# Altium PCB Portier.PcbDoc
Units mm, origin at the board's own origin, x right, y up, seen from the top; angles counter-clockwise.
Board outline 100.33 x 100.33 mm, 2 copper layers (Top Layer, Bottom Layer), stack 1.586 mm thick; 51 components, 37 nets, 201 pads, 58 vias.
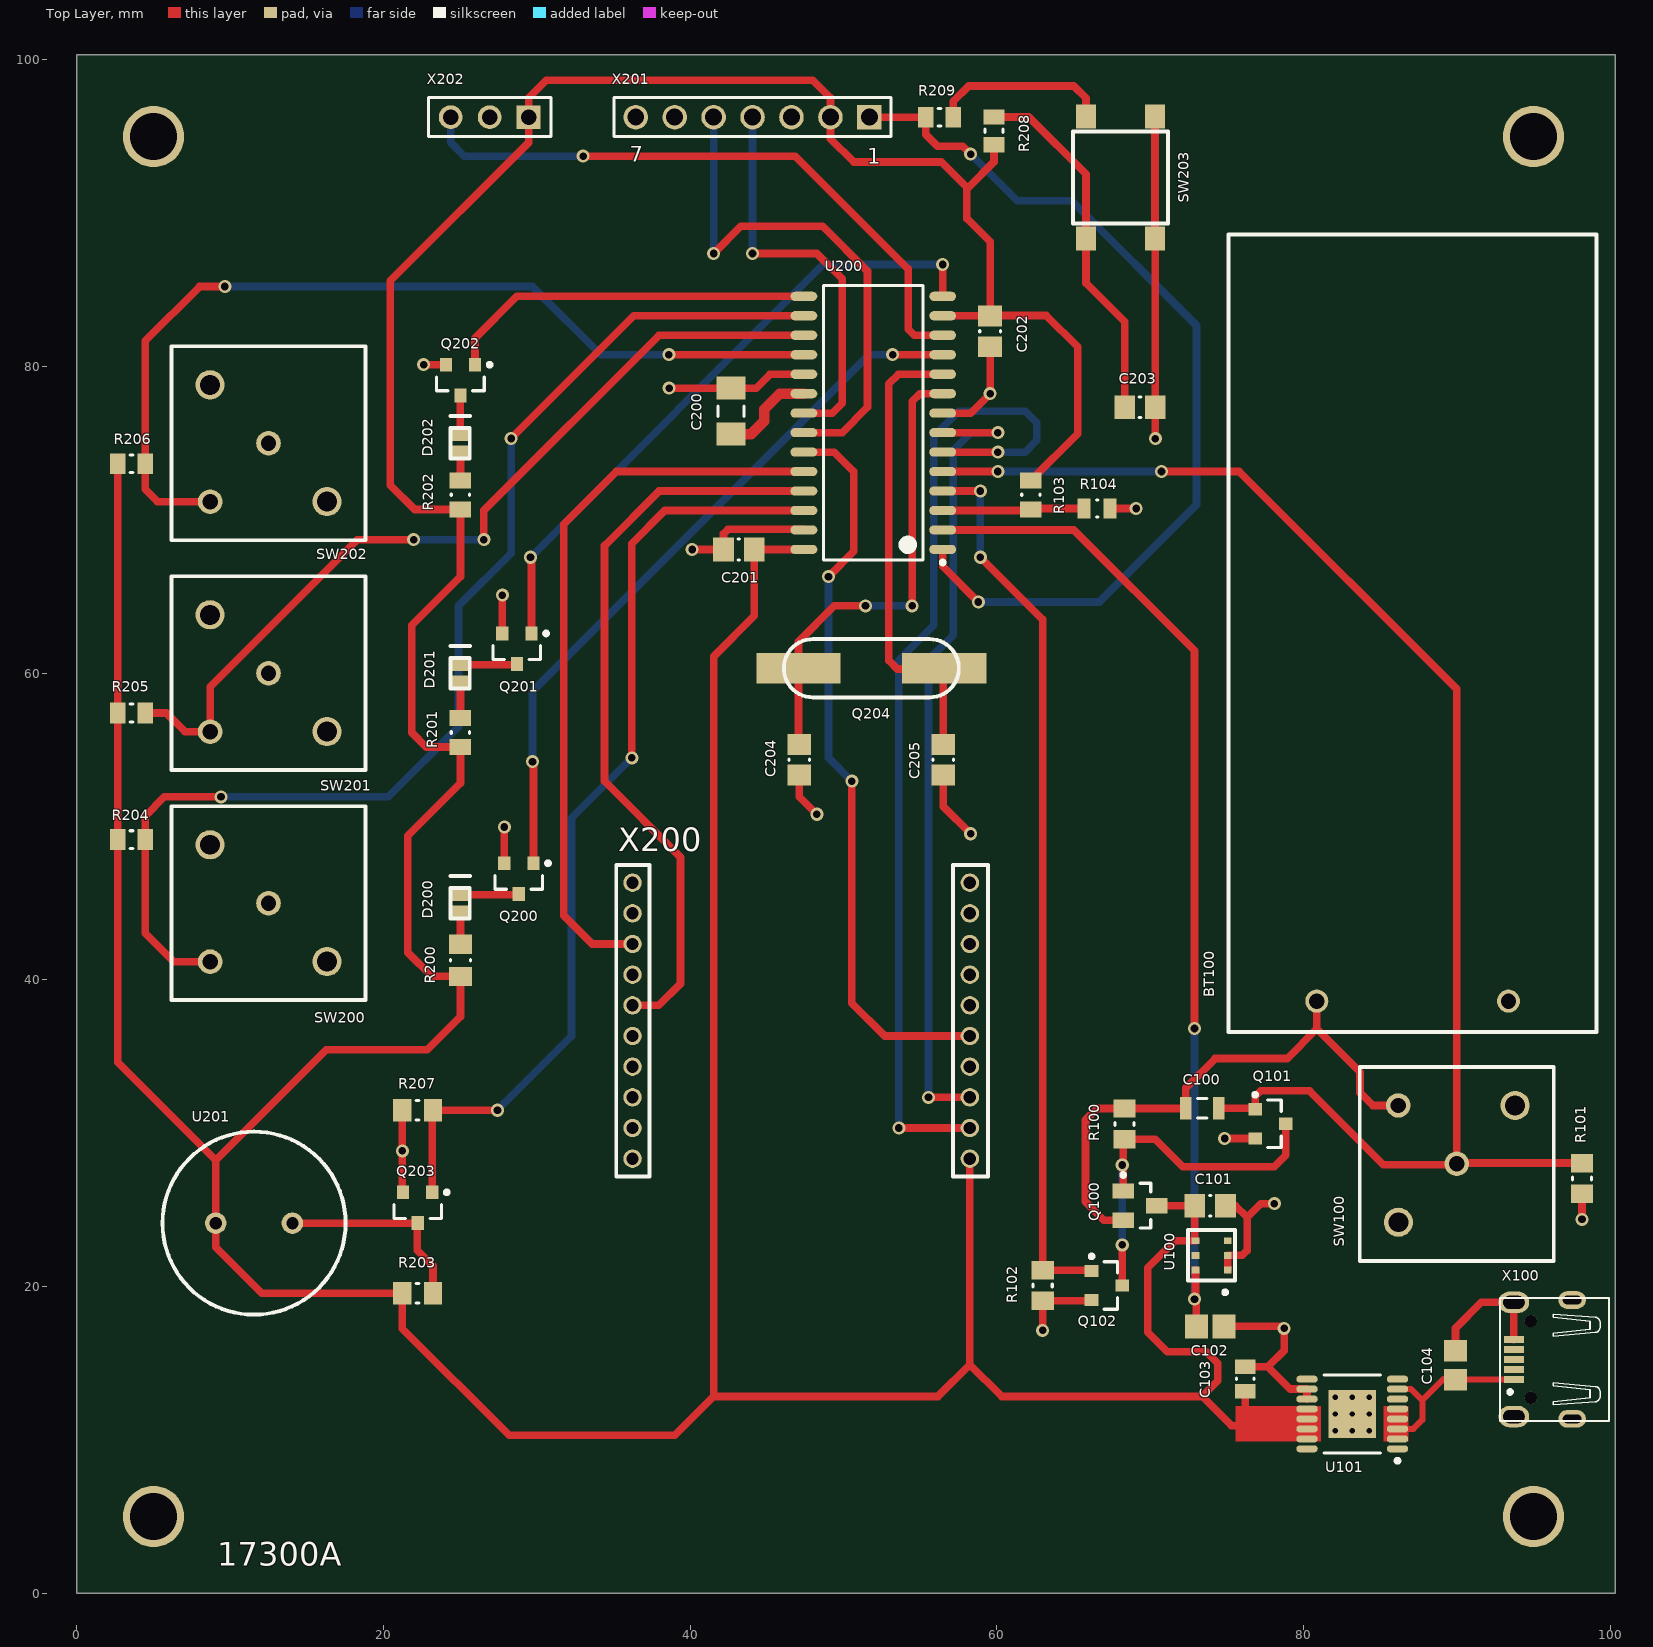
[diagram p0: Top Layer view]
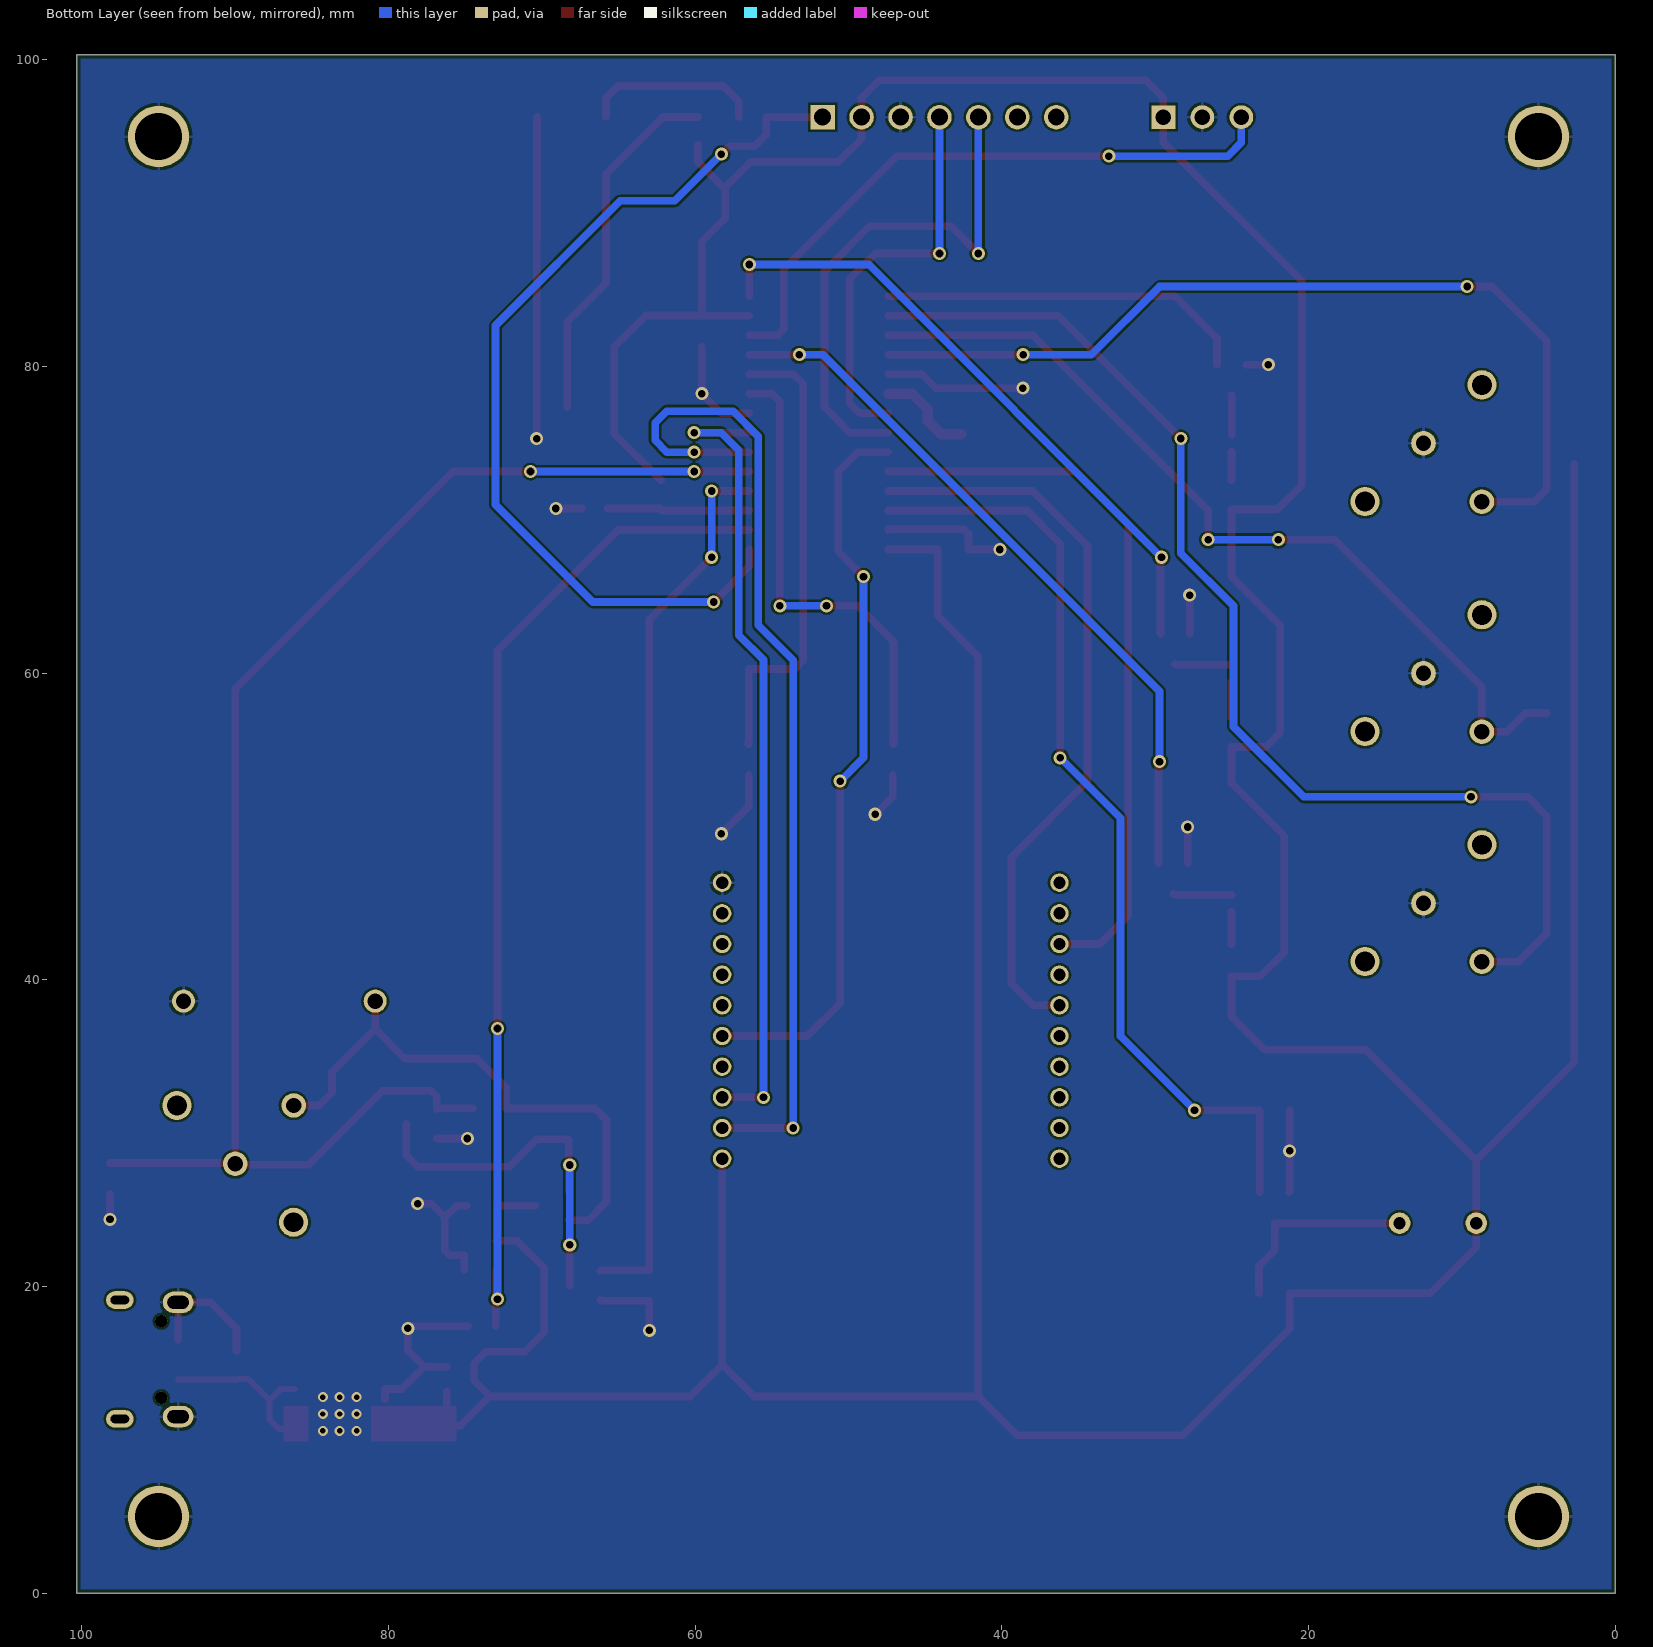
[diagram p1: Bottom Layer view, seen from below]

## Layer stack, top to bottom
Top Solder: solder mask 0.0102, Solder Resist, Dk 3.5
Top Layer: signal copper 0.018
Dielectric1: core 1.55, FR-4, Dk 4.8
Bottom Layer: signal copper 0.018
Bottom Solder: solder mask 0.0102, Solder Resist, Dk 3.5

## Board outline
0,0 100.33,0 100.33,100.33 0,100.33

## Design rules (kind name [scope] priority, off if disabled: settings)
BoardOutlineClearance [All] p1: gap=0.25 ignorepadtopadclearanceinfootprint=FALSE except(0: Arc-SplitContinuation Track-SplitContinuation SMDPad-SplitContinuation THPad-SplitContinuation Via-SplitContinuation Fill-SplitContinuation Poly-SplitContinuation Region-SplitContinuation Text-SplitContinuation)
Clearance Clearance-xPP-xTP-xTT [All] p1: gap=0.15 ignorepadtopadclearanceinfootprint=FALSE except(0: Arc-Hole Track-Hole SMDPad-Hole THPad-Hole Via-Hole Fill-Hole Poly-Hole Region-Hole Text-Hole)
ComponentClearance [All] p1: gap=0.25 collisioncheckmode=3 verticalgap=0.25 showdistances=FALSE
DiffPairsRouting [All] p1: maxlimit=0.25 minlimit=0.25 mostfreqgap=0.25 toplayer_minwidth=0.381 toplayer_maxwidth=0.381 toplayer_prefwidth=0.381 bottomlayer_minwidth=0.381 bottomlayer_maxwidth=0.381 bottomlayer_prefwidth=0.381 maxuncoupledlength=12.5
Height [All] p1: minheight=0 maxheight=25 prefheight=12.5
HoleSize HoleSize-PTH [All] p1: absolutevalues=TRUE maxlimit=3.5 minlimit=0.25 maxpercent=80.000 minpercent=20.000
HoleToHoleClearance [All] p1: gap=0.35 allowstackedmicrovias=TRUE
MinimumAnnularRing [All] p1: minimumring=0.125
MinimumSolderMaskSliver [All] p1: minsoldermaskwidth=0.08
PlaneClearance PlaneClearance-IPI [All] p1: clearance=0.25
PlaneConnect [All] p1: planeconnectstyle=Relief reliefexpansion=0.175 reliefentries=4 reliefconductorwidth=0.2 reliefairgap=0.2
PolygonConnect PolygonConnect-xTW [All] p1: thpad.connectstyle=Relief thpad.reliefconductorwidth=0.2 thpad.reliefentries=4 thpad.polygonreliefangle="90 Angle" thpad.airgapwidth=0.2 smdpad.connectstyle=Relief smdpad.reliefconductorwidth=0.2 smdpad.reliefentries=4 smdpad.polygonreliefangle="90 Angle" smdpad.airgapwidth=0.2 via.connectstyle=Direct via.reliefconductorwidth=0.2 via.reliefentries=4 via.polygonreliefangle="90 Angle" via.airgapwidth=0.2
RoutingCorners [All] p1: cornerstyle=45-Degree minsetback=2.5 maxsetback=2.5
RoutingVias [All] p1: holewidth=0.35 width=0.6 viastyle="Through Hole" minholewidth=0.35 minwidth=0.6 maxholewidth=0.8 maxwidth=1.6
SilkToSilkClearance [All] p1: silktosilkclearance=0.2
SilkToSolderMaskClearance SilkscreenOverComponentPads [IsPad] p1: minsilkscreentomaskgap=0.2 clearancetoexposedcopper=TRUE
SolderMaskExpansion SolderMaskExpansion_1 [IsVia] p1: expansion=-5
SolderMaskExpansion [All] p2: expansion=0.1
UnRoutedNet [All] p1: checkbadconnections=TRUE
Width Width-xTW [All] p1: maxlimit=1.5 minlimit=0.15 preferedwidth=0.2
18 further rules are at their usual default settings.

## Classes and differential pairs
component class Alimentation: BT100 C100 C101 C102 C103 C104 Q100 Q101 Q102 R100 R101 R102 R103 R104 SW100 U100 U101 X100
component class Circuit: C200 C201 C202 C203 C204 C205 D200 D201 D202 P201 Q200 Q201 Q202 Q203 Q204 R200 R201 R202 R203 R204 R205 R206 R207 R208 R209 SW200 SW201 SW202 SW203 U200 U201 X200 X201 X202

## Components (designator, comment, footprint, x,y, rotation, side; value= is the part's Value field where it differs from the comment)
BT100 "2 x 1.5V" BATTERYSUPPORT 87.122,62.611 r180 top value="2x 1V5"
C100 "100nF" CAPC2013X100X20NL20 73.406,31.623 r180 top value="100 nF"
C101 "100nF 16V" CAPC0805(2012)145_M 73.914,25.273 r180 top value=100nF
C102 "1uF" CAPC2013X145X50ML20T25 73.914,17.399 r180 top
C103 "6.8uF 16V" CAPC0805(2012)145_L 76.2,13.97 r270 top value=6.8uF
C104 "4.7uF" CAPC2013X135X45LL10T25 89.916,14.859 r270 top value="4.7 uF"
C200 "10uF" CAPC3216X180X50ML20T25 42.672,77.089 r90 top value="10 uF"
C201 "100nF 16V" CAPC0805(2012)145_M 43.18,68.072 r0 top value=100nF
C202 "100nF 16V" CAPC0805(2012)145_M 59.563,82.296 r90 top value=100nF
C203 "100nF 16V" CAPC0805(2012)145_M 69.342,77.343 r180 top value=100nF
C204 "22pF 16V" CAPC0805(2012)145_M 47.117,54.356 r90 top value=22pF
C205 "22pF 16V" CAPC0805(2012)145_M 56.515,54.356 r90 top value=22pF
D200 "LED_LC" LED_0805 25,45 r90 top value=Green
D201 "LED_LC" LED_0805 25,60 r90 top value=Yellow
D202 "LED_LC" LED_0805 25,75 r90 top value=Red
Q100 "FDN306P" FAIR-SSOT3L-3_V 69.342,25.273 r0 top
Q101 "IRLML2402" INTR-IRLML2402TRPBF-3_V 77.851,30.607 r0 top
Q102 "IRLML2402" INTR-IRLML2402TRPBF-3_V 67.183,20.066 r0 top
Q200 "IRLML2402TRPBF" INTR-IRLML2402TRPBF-3_V 28.829,46.609 r270 top
Q201 "IRLML2402TRPBF" INTR-IRLML2402TRPBF-3_V 28.702,61.595 r270 top
Q202 "IRLML2402TRPBF" INTR-IRLML2402TRPBF-3_V 25.019,79.121 r270 top
Q203 "IRLML2402TRPBF" INTR-IRLML2402TRPBF-3_V 22.225,25.146 r270 top
Q204 "8MHz Oscillator" OSCILLATOR 51.816,60.325 r0 top value=8MHz
R100 "1k" RESC2013X60X35ML10T20 68.326,30.607 r90 top
R101 "100k" RESC2013X60X35ML10T20 98.171,27.051 r90 top
R102 "1k" RESC2013X60X35ML10T20 62.992,20.066 r90 top
R103 "11k 1%" RESC0805(2012)_N 62.23,71.628 r90 top value="1100.00 Ohm"
R104 "22k 1%" RESC0805(2012)_L 66.548,70.739 r180 top value="2200.00 Ohm"
R200 "330R 1%" RESC0805(2012)_M 25.019,41.275 r270 top value="330.00 Ohm"
R201 "750R 1%" RESC0805(2012)_N 25.019,56.134 r90 top value="750.00 Ohm"
R202 "750R 1%" RESC0805(2012)_N 25.019,71.628 r270 top value="750.00 Ohm"
R203 "1k" RESC2013X60X35ML10T20 22.225,19.558 r180 top value=1kOhm
R204 "10k" RESC2013X60X35NL10T20 3.556,49.149 r180 top
R205 "10k" RESC2013X60X35NL10T20 3.556,57.404 r180 top
R206 "10k" RESC2013X60X35NL10T20 3.556,73.66 r180 top
R207 "100k" RESC2013X60X35ML10T20 22.225,31.496 r0 top
R208 "10k" RESC2013X60X35NL10T20 59.817,95.377 r90 top
R209 "1k" RESC2013X60X35NL10T20 56.261,96.266 r180 top
SW100 "Poussoir" SWITCH_SCHURTER 90,28 r0 top
SW200 "SW" SWITCH_SCHURTER 12.5,45 r90 top
SW201 "SW" SWITCH_SCHURTER 12.5,60 r90 top
SW202 "SW" SWITCH_SCHURTER 12.5,75 r90 top
SW203 "430152050836" 4301x20508x6_6x6x5 68.072,92.329 r90 top
U100 "LT1790BCS6" SOT-23 74.007,22.032 r90 top
U101 "MAX1793" TSOP65P640X110_HS-17N 83.185,11.684 r180 top
U200 "PIC32MX130F064B-I/SO" MCHP-SOIC-SO28_L 51.943,76.327 r180 top
U201 "BuzzerPiezo" BUZZER 11.557,24.13 r0 top
X100 "Micro_USB" MICRO_USB 93.726,15.24 r90 top
X200 "Header ZB-SB" ZB-SB 47.244,37.338 r180 top value=2x10
X201 "2.54 mm_THT_Vertical_7 pin" 61300711121 44.069,96.266 r180 top
X202 "TSW-103-07-F-S" SMTC-TSW-103-07-X-S 29.464,96.266 r180 top value=1x3

## Footprints (in the part's own frame and the unit in brackets; to place one, negate y for a bottom-side part, rotate by r counter-clockwise, add the part's x,y. Pads: shape width x height; smd on the part's side, far side on the other; paste and mask are expansions set on the pad)
4301x20508x6_6x6x5 [mm] "6x6mm Tact Switch, SMD version"
  rect 1.55x1.3 smd: 1(-3.975,2.25) 2(-3.975,-2.25) 3(3.975,2.25) 4(3.975,-2.25)
  silkscreen extent -3,-3.1 3,3.1, body extent -4.5,-3.1 4.5,3.1, height 5.02
61300711121 [mm] "Pin Header, pitch 2.54 mm, THT, Vertical, single row, 7p"
  rect 1.6x1.6 hole 1.1: 1(-7.62,0)
  round 1.6 hole 1.1: 2(-5.08,0) 3(-2.54,0) 4(0,0) 5(2.54,0) 6(5.08,0) 7(7.62,0)
  silkscreen extent -9.04,-1.27 9.04,1.27, body extent -8.89,-1.27 8.89,1.27, height 8.57
BATTERYSUPPORT [mm] "Battery Support 2 x 1.5V type AAA"
  round 1.5 hole 1: 1(6.25,24) 2(-6.25,24)
  silkscreen extent -12,-26 12,26, body extent -12,-26 12,25.91, height 13
BUZZER [mm] "Buzzer d_12mm"
  round 1.4 hole 0.8: 1(-2.5,0) 2(2.5,0)
  silkscreen extent -5.97,-5.97 5.97,5.97, body extent -5.97,-5.71 5.97,5.71, height 6.5
CAPC0805(2012)145_L [mm] "Chip Capacitor, Body 2.0x1.2mm, Height 1.45mm, IPC High Density"
  rect 0.95x1.35 smd: 1(-0.8,0) 2(0.8,0)
  silkscreen extent -0.05,-0.58 0.05,0.58, body extent -1.1,-0.72 1.1,0.72, height 1.45
CAPC0805(2012)145_M [mm] "Chip Capacitor, Body 2.0x1.2mm, Height 1.45mm, IPC Low Density"
  rect 1.35x1.55 smd: 1(-1,0) 2(1,0)
  silkscreen extent -0.05,-0.67 0.05,0.67, body extent -1.1,-0.72 1.1,0.72, height 1.45
CAPC2013X100X20NL20 [mm] "Chip Capacitor, 2-Leads, Body 2.2x1.45mm, IPC Medium Density"
  rect 0.75x1.45 smd: 1(-1.075,0) 2(1.075,0)
  silkscreen extent -0.3,-0.63 0.3,0.63, body extent -1.1,-0.72 1.1,0.72, height 1
CAPC2013X135X45LL10T25 [mm] "Chip Capacitor, 2-Leads, Body 2.10x1.35mm, IPC High Density"
  rect 1.4x1.5 smd: 1(-0.95,0) 2(0.95,0)
  body extent -1.05,-0.67 1.05,0.67, height 1.35
CAPC2013X145X50ML20T25 [mm] "Chip Capacitor, 2-Leads, Body 2.00x1.25mm, IPC Low Density"
  rect 1.5x1.55 smd: 1(-0.9,0) 2(0.9,0)
  body extent -1.1,-0.72 1.1,0.72, height 1.45
CAPC3216X180X50ML20T25 [mm] "Chip Capacitor, 2-Leads, Body 3.40x1.80mm, IPC Low Density"
  rect 1.5x1.9 smd: 1(-1.5,0) 2(1.5,0)
  silkscreen extent -0.35,-0.85 0.35,0.85, body extent -1.7,-0.9 1.7,0.9, height 1.8
FAIR-SSOT3L-3_V [mm] "SOT23, 3-Leads, Body 2.92x1.4mm, Pitch 0.95mm"
  rect 1.4x1 smd: 1(-1.1,0.95) 2(-1.1,-0.95) 3(1.1,0)
  silkscreen extent -1.22,-1.46 0.7,2.12, body extent -1.26,-1.46 1.26,1.46, height 1.12
INTR-IRLML2402TRPBF-3_V [mm] "SOT23, 3-Leads, Body 3.05x1.4mm, Pitch 0.95mm"
  rect 0.9x0.8 smd: 1(-1,0.95) 2(-1,-0.95) 3(1,0)
  silkscreen extent -1.12,-1.55 0.7,2.02, body extent -0.7,-1.52 0.7,1.53, height 1.11
LED_0805 [mm] "LED_0805"
  rect 0.8x1.1 smd: 1(-0.55,0) 2(0.55,0)
  silkscreen extent -1,-0.63 1.78,0.64, body extent -1.02,-0.64 1.02,0.64, height 1.25
MCHP-SOIC-SO28_L [mm] "SOIC, 28-Leads, Body 17.9x7.5mm, Pitch 1.27mm, IPC High Density"
  oval 1.75x0.6 smd: 1(-4.525,8.255) 2(-4.525,6.985) 3(-4.525,5.715) 4(-4.525,4.445) 5(-4.525,3.175) 6(-4.525,1.905) 7(-4.525,0.635) 8(-4.525,-0.635) 9(-4.525,-1.905) 10(-4.525,-3.175) 11(-4.525,-4.445) 12(-4.525,-5.715) 13(-4.525,-6.985) 14(-4.525,-8.255) 15(4.525,-8.255) 16(4.525,-6.985) 17(4.525,-5.715) 18(4.525,-4.445) 19(4.525,-3.175) 20(4.525,-1.905) 21(4.525,-0.635) 22(4.525,0.635) 23(4.525,1.905) 24(4.525,3.175) 25(4.525,4.445) 26(4.525,5.715) 27(4.525,6.985) 28(4.525,8.255)
  silkscreen extent -4.65,-8.95 3.25,9.23, body extent -3.75,-8.95 3.75,8.95, height 2.65
MICRO_USB [mm] "WR-COM_USB_Micro Type B_Horizontal_SMT Micro Type B Horizontal SMT - 3A current at Pin1 & Pin 5 - with Pegs and THT shielding Pins  - T&R Packaging"
  rect 0.45x1.3 smd: 1(-1.3,0) 2(-0.65,0) 3(0,0) 4(0.65,0) 5(1.3,0)
  oval 1.4x2 hole 0.85 slot 1.4 at 90 deg: Z1(-3.725,0) Z2(3.725,0)
  oval 1.15x1.8 hole 0.55 slot 1.2 at 90 deg: Z4(-3.875,-3.8) Z4(3.875,-3.8)
  round 0.8 hole 0.8 unplated: ""(-2.5,-1.1) ""(2.5,-1.1)
  silkscreen extent -4,-6.2 4,0.9, body extent -4,-6.25 4,0.35, height 2.67
OSCILLATOR [mm] "Oscillator 8MHz"
  rect 5.5x2 smd: 1(-4.75,0) 2(4.75,0)
  silkscreen extent -5.71,-1.9 5.71,1.9, body extent -5.71,-1.9 5.71,1.9, height 3.7
RESC0805(2012)_L [mm] "Chip Resistor, Body 2.0x1.3mm, IPC High Density"
  rect 0.85x1.3 smd: 1(-0.85,0) 2(0.85,0)
  silkscreen extent -0.05,-0.55 0.05,0.55, body extent -1.1,-0.67 1.1,0.68, height 0.7
RESC0805(2012)_M [mm] "Chip Resistor, Body 2.0x1.3mm, IPC Low Density"
  rect 1.25x1.5 smd: 1(-1.05,0) 2(1.05,0)
  silkscreen extent -0.05,-0.65 0.05,0.65, body extent -1.1,-0.67 1.1,0.67, height 0.7
RESC0805(2012)_N [mm] "Chip Resistor, Body 2.0x1.3mm, IPC Medium Density"
  rect 1.05x1.4 smd: 1(-0.95,0) 2(0.95,0)
  silkscreen extent -0.05,-0.6 0.05,0.6, body extent -1.1,-0.67 1.1,0.68, height 0.7
RESC2013X60X35ML10T20 [mm] "Chip Resistor, 2-Leads, Body 2.1x1.35mm, IPC Low Density"
  rect 1.2x1.45 smd: 1(-1,0) 2(1,0)
  silkscreen extent -0.1,-0.63 0.1,0.63, body extent -1.05,-0.68 1.05,0.67, height 0.6
RESC2013X60X35NL10T20 [mm] "Chip Resistor, 2-Leads, Body 2.1x1.35mm, IPC Medium Density"
  rect 1x1.35 smd: 1(-0.9,0) 2(0.9,0)
  silkscreen extent -0.1,-0.58 0.1,0.58, body extent -1.05,-0.68 1.05,0.67, height 0.6
SMTC-TSW-103-07-X-S [mm] ".025 SQ Post Terminal Strip Assembly, 1x3 Pins, Vertical, 2.54mm Pitch, Male"
  rect 1.55x1.55 hole 1.02: 1(0,0)
  round 1.55 hole 1.02: 2(2.54,0) 3(5.08,0)
  silkscreen extent -1.46,-1.27 6.54,1.27, body extent -1.27,-1.27 6.35,1.27, height 8.38
SOT-23 [mm] "LT1790  SOT-23"
  rect 0.45x0.5 smd: 1(-0.95,-1.05) 2(0,-1.05) 3(0.95,-1.05) 4(0.95,1.05) 5(0,1.05) 6(-0.95,1.05)
  silkscreen extent -2.54,-1.52 1.65,1.52, body extent -1.52,-1.14 1.52,1.05, height 1.25
SWITCH_SCHURTER [mm] "switch 12.7x12.7"
  round 1.6 hole 1: 1(0,0) 2(-3.81,3.81)
  round 1.9 hole 1.3: " "(-3.81,-3.81) " "(3.81,3.81)
  silkscreen extent -6.32,-6.32 6.32,6.32, body extent -6.35,-6.35 6.35,6.22, height 17.5
TSOP65P640X110_HS-17N [mm] "TSOP, 16-Leads, Body 5.00x4.40mm, Pitch 0.65mm, Thermal Pad 3.10x3.10mm, IPC Medium Density"
  oval 1.4x0.45 smd: 1(-2.95,2.275) 2(-2.95,1.625) 3(-2.95,0.975) 4(-2.95,0.325) 5(-2.95,-0.325) 6(-2.95,-0.975) 7(-2.95,-1.625) 8(-2.95,-2.275) 9(2.95,-2.275) 10(2.95,-1.625) 11(2.95,-0.975) 12(2.95,-0.325) 13(2.95,0.325) 14(2.95,0.975) 15(2.95,1.625) 16(2.95,2.275)
  rect 3.1x3.1 smd: EP(0,0)
  silkscreen extent -3.08,-2.55 1.85,3.17, body extent -3.19,-2.55 3.19,2.55, height 1.1
ZB-SB [mm] "Header"
  round 1.2 hole 0.8: 1(-11,9) 2(-11,7) 3(-11,5) 4(-11,3) 5(-11,1) 6(-11,-1) 7(-11,-3) 8(-11,-5) 9(-11,-7) 10(-11,-9) 11(11,9) 12(11,7) 13(11,5) 14(11,3) 15(11,1) 16(11,-1) 17(11,-3) 18(11,-5) 19(11,-7) 20(11,-9)
  silkscreen extent -12.19,-10.16 12.07,10.16, body extent -12.06,-10.22 12.06,10.16, height 6

## Part data
BT100: library part "Battery connector AAA", "Battery Support 2x1.5V type AAA", Manufacturer="Keystone Electronics", PartNumber=1022, Supplier=Digi-key, Supplier PN=36-1022-ND
C100: library part CMP-1663-00007-1, "Chip Capacitor, 100 nF, +/- 10%, 16 V, -55 to 85 degC, 0805 (2012 Metric), RoHS, Tape and Reel", PackageCase=0805, Voltage Rating="16 V"
C101 C201 C202 C203: library part CMP-1036-04404-1, "CAP 100nF 16V ±20% 0805 (2012 Metric) Thickness 1.45mm SMD", PackageCase=0805
C102: library part CMP-2100-03605-1, "Chip Capacitor, 1 uF, 25 V, 10%, -55 to 125 degC, 0805 (2012 Metric), RoHS, Tape and Reel", PackageCase=0805, Voltage Rating=25V
C103: library part CMP-1036-04912-1, "CAP 6.8uF 16V ±20% 0805 (2012 Metric) Thickness 1.45mm SMD", PackageCase=0805
C104: library part CMP-1662-00015-2, "Chip Capacitor, 4.7 uF, +/- 10%, 16 V, -55 to 85 degC, 0805 (2012 Metric), RoHS, Tape and Reel", PackageCase=0805, PartNumber=GRM21BR61C475KA88L, Voltage Rating="16 V"
C200: library part CMP-1664-00006-1, "CAP, Ceramic, 10 uF, +/- 10%, 16 V, -55 to 125 degC, 1206 (3216 Metric), RoHS, Tape and Reel", PackageCase=0603, Voltage Rating="50 V"
C204 C205: library part CMP-1036-04404-1, "CAP 22pF 16V ±20% 0805 (2012 Metric) Thickness 1.45mm SMD", PackageCase=0805
D200: library part "LED LOW CURRENT", "LED_LOWCurrent", Manufacturer=Kingbright, PartNumber=APTD20120LZGCK, Voltage Rating=2V65, Supplier=Mouser, Supplier PN=604-APTD2012LZGCK
D201: library part "LED LOW CURRENT", "LED_LOWCurrent", Manufacturer=Kingbright, PartNumber=APTD2012LSYCK, Voltage Rating=1V85, Supplier=Mouser, Supplier PN=604-APTD2012LSYCK
D202: library part "LED LOW CURRENT", "LED_LOWCurrent", Manufacturer=Kingbright, PartNumber=APTD2012LSURCK, Voltage Rating=1V75, Supplier=Mouser, Supplier PN=604-APTD2012LSURCK
Q100: library part CMP-2000-06248-1, "P-Channel Specified Power Trench (R) MOSFET, 1.8 V, -55 to 150 degC, 3-Pin SOT, RoHS, Tape and Reel", Manufacturer="ON Semiconductor", PackageCase=SSOT-3, PartNumber=FDN306P, Supplier=Digi-key, Supplier PN=FDN306PCT-ND
Q101 Q102 Q200 Q201 Q202 Q203: library part CMP-2000-05155-1, "HEXFET(R) Power MOSFET, N-Channel, 20 V, 1.2 A, 3-Pin SOT-23, RoHS, Tape and Reel", Manufacturer="Infineon Technologies", PackageCase=SOT-23, PartNumber=IRLML2402TRBF, Supplier=Digi-key, Supplier PN=IRLML2402PBFCT-ND
Q204: library part "Oscillator 8MHz", "Oscillator 8MHz", Manufacturer=IQD, PartNumber="LF XTAL003151", Supplier=Distrelec, Supplier PN=174-52-030
R100 R102 R203: library part CMP-2100-03671-1, "Chip Resistor, 1 KOhm, +/- 1%, 125 mW, -55 to 155 degC, 0805 (2012 Metric), RoHS, Tape and Reel", PackageCase=0805, Voltage Rating=150V
R101 R207: library part CMP-2100-03671-1, "Chip Resistor, 100 KOhm, +/- 1%, 125 mW, -55 to 155 degC, 0805 (2012 Metric), RoHS, Tape and Reel", PackageCase=0805, Voltage Rating=150V
R103: library part CMP-1013-00075-1, "11k 0.125W 0805 (2012 Metric)  SMD", PackageCase=0805
R104: library part CMP-1013-00082-1, "22k 0.125W  0805 (2012 Metric)  SMD", PackageCase=0805
R200: library part CMP-1013-00454-1, "330R 0.125W 1% 0805 (2012 Metric)  SMD", PackageCase=0805
R201 R202: library part CMP-1013-00496-1, "750R 0.125W 1% 0805 (2012 Metric)  SMD", PackageCase=0805
R204 R205 R206: library part CMP-1659-00013-4, "Chip Resistor, 10 KOhm, +/- 1%, 0.125 W, -55 to 155 degC, 0805 (2012 Metric), RoHS, Tape and Reel", PackageCase=0805, Voltage Rating="150 V"
R208: library part CMP-1659-00011-4, "Chip Resistor, 10 KOhm, +/- 1%, 0.125 W, -55 to 155 degC, 0805 (2012 Metric), RoHS, Tape and Reel", PackageCase=0805, Voltage Rating="150 V"
R209: library part CMP-1659-00011-4, "Chip Resistor, 1 KOhm, +/- 1%, 0.125 W, -55 to 155 degC, 0805 (2012 Metric), RoHS, Tape and Reel", PackageCase=0805, Voltage Rating="150 V"
SW100 SW200 SW201 SW202: library part Switch_Schurter, "Switch 12.7x12.7x17.5", Manufacturer=Schurter
SW203: "WS-TASV 6x6mm Tact Switch, SMD version", ComponentLink1Description=Manufacturer, ComponentLink1URL=http://www.we-online.de, ComponentLink2Description=Datasheet, ComponentLink2URL=http://katalog.we-online.de/em/datasheet/4301x2xxx8x6.pdf, Life Cycle="200000 cycles", Operation Force=360g, Part Number=430152050836, Published Date="June 2017", Publisher="Wurth Elektronik", Size="6x6x5 mm"
U100: library part LT1790, "IC VREF SERIES 2.048V SOT23-6", Manufacturer="Linear Technology", PackageCase=SOT-23, PartNumber=LT1790BCS6-2.048#TRMPBF, Supplier=Digi-key, Supplier PN=LT1790BCS6-2.048#TRMPBFCT-ND
U101: "IC REG LINEAR POS ADJ 1A 16TSSOP", Manufacturer="Maxim Integrated"
U200: library part CMP-0048-00454-1, "32-bit Microcontroller with Audio and Graphics Interface, USB and Advanced Analog, 40 MHz, 21 I/O, PMP, -40 to 85 degC, 28-pin SOIC (SO28), Tube", Manufacturer=Microchip, ComponentLink1Description="Manufacturer URL", ComponentLink1URL=http://www.microchip.com, ComponentLink2Description=Datasheet, ComponentLink2URL=http://ww1.microchip.com/downloads/en/DeviceDoc/61168E.pdf, ComponentLink3Description="Package Specification", ComponentLink3URL=http://www.microchip.com/stellent/groups/techpub_sg/documents/packagingspec/en012702.pdf, ComponentLink4Description="Product URL", ComponentLink4URL=http://www.microchip.com/PIC32MX130F064B, DatasheetVersion="Rev. E", Mounting Technology="Surface Mount", PackageDescription="28-Lead Plastic Small Outline, 17.9 x 7.5 mm Body, 1.27 mm Pitch", PackageReference=SOIC-SO28, PackageVersion=C04-052C, PartNumber=PIC32MX130F064B-I/SO
U201: library part BZR, "Buzzer 12mm piezo", Manufacturer="TDK Corporation", PartNumber=PS1240P02BT, Supplier=Digi-key, Supplier PN=445-2525-3-ND
X100: library part "WR-Communication Connectors 629105150521", "WR-COM_USB_Micro Type B_Horizontal_SMT", Manufacturer="Würth Elektronik eiSos GmbH", PartNumber=629105150521, Voltage Rating=5V, Supplier=Digi-key, Supplier PN=732-5960-1-ND
X200: library part "HDR ZB-SB 2x10", "Header 2x10", PackageCase=XBee
X201: library part 61300711121, "Pin Header WR-PHD, pitch 2.54 mm, THT, Vertical, single row, 7 pin", Contact Resistance="20 mOhm", Insulation Resistance=">1000 MOhm", Operating Temperature="-40 to 105 degC", Rated Current="3 A", Working Voltage="250 VAC", ComponentLink1Description=Manufacturer, ComponentLink1URL=http://www.we-online.de, ComponentLink2Description=Datasheet, ComponentLink2URL=http://katalog.we-online.de/em/datasheet/6130xx11121.pdf, Mounting Technology=THT, Orientation=Vertical, Part Number=61300711121, Pin Number=7, Pitch="2.54 mm", Published Date="Jan. 2018", Publisher="Wurth Elektronik", Row Number=Single
X202: library part CMP-1024-00331-1, "0.025\" SQ Post Header, Through-hole, Vertical, -55 to 125 degC, 2.54 mm Pitch, 3-Pin, Male, RoHS", Manufacturer=Samtec, PackageCase=TSW-103-07-X-S, PartNumber=TSW-103-07-F-S, Supplier=Digi-key, Supplier PN=SAM8995-ND

## Free pads (board coordinates)
  round 4 hole 3.05: 2(5,5) 3(95,5) 4(95,95) 5(5,95)

## Via types
v1: diameter 0.85, hole 0.5, Top Layer to Bottom Layer, 49 vias
v2: diameter 0.65, hole 0.35, Top Layer to Bottom Layer, 9 vias

## Nets (pads, with @x,y where several pads share a name; then routed paths per layer and width w, separated by ;. In a path a pad name is that pad's centre, name@x,y a point inside that pad or via, vN(x,y) a via of type N, cw(c..) or ccw(c..) an arc to the next point about the centre after c; other vN are vias at no path point)
+VBAT: BT100.1 C100.2 Q100.2 R100.2 SW100.2 | length 36.6
  Top Layer w0.5: Q100.2 66.99,24.323 65.786,25.527 65.786,30.861 66.532,31.607 R100.2 72.315,31.607 72.315,32.945 74.236,34.866 78.935,34.866 80.872,36.803 ; BT100.1 80.872,36.803 ; SW100.2 84.522,31.81 83.693,32.639 83.693,33.982 80.872,36.803
BZZR: Q203.1 R207.2 U200.26 | length 62.3
  Top Layer w0.5: Q203.1 23.175,31.446 R207.2 v1(27.432,31.496) ; v1(36.195,54.483) 36.195,68.453 38.354,70.612 U200.26
  Bottom Layer w0.5: v1(27.432,31.496) 32.258,36.322 32.258,50.546 v1(36.195,54.483)
Connect(M): U200.24 X200.18 | length 47.9
  Top Layer w0.5: X200.18 33.608,42.338 31.75,44.196 31.75,69.723 35.179,73.152 U200.24
GND: BT100.2 C101.1 C102.1 C103.1 C104.1 C200.2 C201.1 C202.1 C203.1 C204.1 C205.1 pad.2 pad.3 pad.4 pad.5 Q101.2 Q102.2 Q200.2 Q201.2 Q202.2 Q203.2 R101.1 R102.1 R104.1 R207.1 SW200.1 SW201.1 SW202.1 SW203.2 SW203.4 U100.1 U100.2 U101.10 U101.11 U101.EP U200.8 U200.19 U200.27 X100.5 X100.Z1 X100.Z2 X200.10 X201.3 X202.2 | length 104.1
  Top Layer w0.5: R207.1 v1(21.225,28.845) 21.225,26.196 Q203.2 ; v1(22.622,80.121) Q202.2 ; Q201.2 v1(27.752,65.09) ; Q200.2 v1(27.879,49.972) ; v1(38.632,78.589) C200.2 44.299,78.589 45.212,79.502 U200.19 ; v1(40.132,68.072) C201.1 42.18,69.104 42.473,69.397 47.418,69.397 U200.27 ; C204.1 47.117,51.943 v1(48.26,50.8) ; U200.8 58.293,76.962 v1(59.563,78.232) C202.1 ; C205.1 56.515,51.308 v1(58.293,49.53) ; v1(62.992,17.145) R102.1 66.133,19.066 Q102.2 ; R104.1 v1(69.088,70.739) ; SW203.4 SW203.2 70.342,88.334 C203.1 v1(70.342,75.295) ; C102.1 78.613,17.399 v1(78.74,17.272) 78.74,15.824 77.686,14.77 ; v1(74.864,29.657) Q101.2 ; C101.1 75.565,25.273 76.327,24.511 ; U100.1 U100.2 76.007,22.032 76.327,22.352 76.327,24.511 ; C103.1 77.686,14.77 ; v1(78.105,25.4) 77.216,25.4 76.327,24.511 ; U101.11 U101.10 79.147,13.309 77.686,14.77 ; C104.1 89.916,17.272 91.609,18.965 X100.Z2 X100.5 ; v1(98.171,24.384) R101.1
  other v2: 82.085,10.584 83.185,10.584 84.285,10.584 82.085,11.684 83.185,11.684 84.285,11.684 82.085,12.784 83.185,12.784 84.285,12.784
LED1: Q200.1 U200.11 | length 47.1
  Top Layer w0.5: v1(29.718,54.229) 29.779,54.168 Q200.1 ; v1(53.213,80.772) U200.11
  Bottom Layer w0.5: v1(29.718,54.229) 29.718,58.825 51.665,80.772 v1(53.213,80.772)
LED2: Q201.1 U200.14 | length 41.9
  Top Layer w0.5: v1(29.591,67.564) 29.652,67.503 Q201.1 ; U200.14 v1(56.468,86.661)
  Bottom Layer w0.5: v1(29.591,67.564) 48.688,86.661 v1(56.468,86.661)
LED3: Q202.1 U200.15 | length 24.3
  Top Layer w0.5: Q202.1 25.969,81.849 28.702,84.582 U200.15
LINK(M): U200.25 X200.16 | length 48.8
  Top Layer w0.5: X200.16 37.957,38.338 39.37,39.751 39.37,48.006 34.417,52.959 34.417,68.326 37.973,71.882 U200.25
N_A: U200.12 X202.3 | length 41.2
  Top Layer w0.5: v1(33.02,93.726) 46.863,93.726 54.229,86.36 54.229,82.423 54.61,82.042 U200.12
  Bottom Layer w0.5: X202.3 24.384,94.615 25.273,93.726 v1(33.02,93.726)
NetC100_1: C100.1 Q101.1 R101.2 SW100.1 U200.5 | length 97.1
  Top Layer w0.5: U200.5 v1(60.071,73.152) ; v1(70.739,73.152) 75.819,73.152 90,58.971 SW100.1 ; C100.1 76.785,31.623 Q101.1 76.851,32.401 77.216,32.766 80.391,32.766 85.217,27.94 89.94,27.94 SW100.1 ; R101.2 90.051,28.051 SW100.1
  Bottom Layer w0.5: v1(60.071,73.152) v1(70.739,73.152)
NetC102_2: C102.2 U100.6 U200.2 | length 65.7
  Top Layer w0.5: U200.2 65.024,69.342 72.898,61.468 v1(72.898,36.83) ; U100.6 72.957,19.236 v1(72.898,19.177) 73.014,19.061 C102.2
  Bottom Layer w0.5: v1(72.898,19.177) v1(72.898,36.83)
NetC104_2: C104.2 U101.2 U101.3 U101.4 U101.5 U101.7 X100.1 | length 11.9
  Top Layer w0.4: U101.3@85.885,10.709 U101.3 87.163,10.709 87.757,11.303 87.757,12.573 ; U101.7 87.021,13.309 87.757,12.573 ; X100.1 89.947,13.94 C104.2 89.855,13.97 89.154,13.97 87.757,12.573
NetC200_1: C200.1 U200.20 | length 6.3
  Top Layer w0.7: C200.1 43.966,75.589 44.831,76.454 44.831,77.216 45.847,78.232 U200.20
NetC203_2: C203.2 R208.2 SW203.1 | length 23.8
  Top Layer w0.5: R208.2 62.092,96.277 65.822,92.547 SW203.1 65.822,85.435 68.342,82.915 C203.2
NetD200_1: D200.1 R200.1 | length 2.1
  Top Layer w0.5: D200.1 25.019,44.431 R200.1
NetD200_2: D200.2 Q200.3 | length 3.9
  Top Layer w0.5: D200.2 28.77,45.55 Q200.3
NetD201_1: D201.1 R201.2 | length 2.4
  Top Layer w0.5: D201.1 25.019,59.431 R201.2
NetD201_2: D201.2 Q201.3 | length 3.7
  Top Layer w0.5: D201.2 28.657,60.55 Q201.3
NetD202_1: D202.1 R202.1 | length 1.9
  Top Layer w0.5: D202.1 25.019,74.431 R202.1
NetD202_2: D202.2 Q202.3 | length 2.6
  Top Layer w0.5: D202.2 25,78.102 Q202.3
NetQ100_1: Q100.1 Q101.3 Q102.3 R100.1 | length 25
  Top Layer w0.5: Q102.3 v1(68.183,22.717) ; Q100.1 68.242,27.865 v1(68.183,27.924) 68.242,27.983 68.242,29.523 R100.1 70.342,29.607 72.136,27.813 78.105,27.813 78.851,28.559 Q101.3
  Bottom Layer w0.5: v1(68.183,22.717) v1(68.183,27.924)
NetQ102_1: Q102.1 R102.2 U200.4 | length 58.2
  Top Layer w0.5: U200.4 v1(58.928,71.882) ; v1(58.928,67.564) 62.992,63.5 R102.2 66.133,21.066 Q102.1
  Bottom Layer w0.5: v1(58.928,67.564) v1(58.928,71.882)
NetQ203_3: Q203.3 R203.1 U201.2 | length 13.1
  Top Layer w0.5: U201.2 22.209,24.13 22.209,22.368 23.225,21.352 R203.1
NetR103_1: R103.1 R104.2 U200.3 | length 9.3
  Top Layer w0.5: U200.3 62.164,70.612 R103.1 62.291,70.739 R104.2
NetR209_1: R209.1 SW203.3 | length 11.6
  Top Layer w0.5: R209.1 57.161,97.293 58.166,98.298 65.024,98.298 65.822,97.5 SW203.3
OSC1: C204.2 Q204.1 U200.9 | length 30.6
  Top Layer w0.5: C204.2 47.066,55.407 Q204.1 47.066,62.052 49.403,64.389 v1(51.435,64.389) ; v1(54.483,64.389) 54.483,77.724 54.991,78.232 U200.9
  Bottom Layer w0.5: v1(51.435,64.389) v1(54.483,64.389)
OSC2: C205.2 Q204.2 U200.10 | length 30.6
  Top Layer w0.5: U200.10 53.594,79.502 52.959,78.867 52.959,60.833 53.518,60.274 56.515,60.274 C205.2 C205.2@56.566,55.407
PGEC: U200.22 X201.5 | length 34.6
  Top Layer w0.5: v1(41.529,87.376) 43.307,89.154 48.641,89.154 51.562,86.233 51.562,77.343 49.911,75.692 U200.22
  Bottom Layer w0.5: v1(41.529,87.376) X201.5
PGED: U200.21 X201.4 | length 26.3
  Top Layer w0.5: v1(44.069,87.376) 48.26,87.376 49.911,85.725 49.911,77.597 49.276,76.962 U200.21
  Bottom Layer w0.5: v1(44.069,87.376) X201.4
Reset: R209.2 U200.1 X201.1 | length 60.6
  Top Layer w0.5: X201.1 R209.2 55.361,95.134 56.134,94.361 57.785,94.361 v1(58.293,93.853) ; U200.1 56.468,66.976 v1(58.801,64.643)
  Bottom Layer w0.5: v1(58.293,93.853) 61.341,90.805 64.897,90.805 73.025,82.677 73.025,70.993 66.675,64.643 v1(58.801,64.643)
Reset(M): U200.23 X200.5 | length 48.4
  Top Layer w0.5: U200.23 49.403,74.422 50.673,73.152 50.673,67.945 v1(49.022,66.294) ; v1(50.546,52.959) 50.546,38.481 52.689,36.338 X200.5
  Bottom Layer w0.5: v1(49.022,66.294) 49.022,54.483 v1(50.546,52.959)
SW1: R204.1 SW200.2 U200.16 | length 78.1
  Top Layer w0.5: SW200.2 6.308,41.19 4.456,43.042 R204.1 4.456,50.684 5.713,51.941 v1(9.396,51.941) ; v1(28.321,75.311) 36.322,83.312 U200.16
  Bottom Layer w0.5: v1(9.396,51.941) 20.318,51.941 24.892,56.515 24.892,64.389 28.321,67.818 v1(28.321,75.311)
SW2: R205.1 SW201.2 U200.17 | length 57.1
  Top Layer w0.5: R205.1@4.494,57.366 R205.1 5.842,57.404 7.056,56.19 SW201.2 8.69,59.109 18.288,68.707 v1(21.971,68.707) ; v1(26.543,68.707) 26.543,70.612 37.973,82.042 U200.17
  Bottom Layer w0.5: v1(21.971,68.707) v1(26.543,68.707)
SW3: R206.1 SW202.2 U200.18 | length 60.7
  Top Layer w0.5: SW202.2 5.264,71.19 4.456,71.998 R206.1 4.456,81.672 8.001,85.217 v1(9.652,85.217) v1@9.561,85.126 ; v1(38.608,80.772) 38.614,80.778 47.418,80.778 U200.18
  Bottom Layer w0.5: v1(9.652,85.217) 29.718,85.217 34.163,80.772 v1(38.608,80.772)
UART_RX: U200.6 X200.2 | length 66
  Top Layer w0.5: v1(53.609,30.338) X200.2 ; U200.6 v1(60.071,74.422)
  Bottom Layer w0.5: v1(53.609,30.338) 53.609,60.848 55.88,63.119 55.88,75.438 57.531,77.089 61.849,77.089 62.611,76.327 62.611,75.184 61.849,74.422 v1(60.071,74.422)
UART_TX: U200.7 X200.3 | length 52.6
  Top Layer w0.5: v1(55.546,32.338) X200.3 ; U200.7 v1(60.071,75.692)
  Bottom Layer w0.5: v1(55.546,32.338) 55.546,60.88 57.15,62.484 57.15,74.549 58.293,75.692 v1(60.071,75.692)
VCC: C101.2 C103.2 C201.2 C202.2 Q100.3 R103.2 R200.2 R201.1 R202.2 R203.2 R204.2 R205.2 R206.2 R208.1 U100.4 U101.12 U101.13 U101.14 U101.15 U200.13 U200.28 U201.1 X200.1 X201.2 X202.1 | length 386.9
  Top Layer w0.5: R206.2 R205.2 R204.2 2.656,34.635 9.057,28.234 ; U200.28 C201.2 44.18,63.738 41.53,61.088 41.53,12.828 ; U200.13 59.547,83.312 C202.2 ; X200.1 58.244,14.908 ; R208.1 59.817,93.345 58.166,91.694 58.039,91.694 ; R103.2 65.278,75.626 65.278,81.28 63.23,83.328 59.595,83.328 C202.2 ; Q100.3 C101.2 72.914,23.025 U100.4 71.623,22.982 69.85,21.209 69.85,17.018 71.12,15.748 73.66,15.748 74.422,14.986 74.422,13.845 73.405,12.828 ; 76.2,11.938 C103.2 ; 76.327,10.922 75.311,10.922 73.405,12.828 ; 9.057,28.234 16.256,35.433 22.86,35.433 25.019,37.592 R200.2 23.148,40.225 21.59,41.783 21.59,49.403 25.019,52.832 R201.1 22.794,55.184 21.844,56.134 21.844,63.119 25.019,66.294 R202.2 22.032,70.678 20.447,72.263 20.447,85.598 29.464,94.615 X202.1 29.464,97.536 30.607,98.679 48.006,98.679 49.149,97.536 X201.2 49.149,94.869 50.673,93.345 56.388,93.345 58.039,91.694 ; 9.057,28.234 U201.1 9.057,22.566 12.065,19.558 R203.2 21.225,17.256 28.194,10.287 38.989,10.287 41.53,12.828 ; 41.53,12.828 56.164,12.828 58.244,14.908 ; 58.039,91.694 58.039,89.662 59.563,88.138 C202.2 ; 58.244,14.908 60.324,12.828 73.405,12.828
pads on no net: "SW100. " "SW200. " "SW201. " "SW202. " U100.3 U100.5 U101.1 U101.6 U101.8 U101.9 U101.16 X100. X100.2 X100.3 X100.4 X100.Z4 X200.4 X200.6 X200.7 X200.8 X200.9 X200.11 X200.12 X200.13 X200.14 X200.15 X200.17 X200.19 X200.20 X201.6 X201.7

## Polygon pours and split planes (outlines as drawn)
GND on Bottom Layer "GND" (solid, pour order 0): 0,0 0,100.33 100.33,100.33 100.33,0

## Other copper
Top Layer:
  rectangle net VCC: 75.565,9.906 81.153,12.192
  rectangle net NetC104_2: 85.217,9.906 86.868,12.192

## Silkscreen, mask and mechanical layers (free items; w line width, h text height)
Top Overlay:
  text "17300A" at 9.144,1.778 h1.52
Mechanical 1:
  lines w0.254: 34.163,52.303 34.163,11.303 59.163,11.303 ; 34.236,52.324 59.236,52.324 ; 59.309,11.25 59.309,52.25 ; 0,0 0,100.33 100.33,100.33 100.33,0 0,0

## Text inside footprints (layer, text, board x,y; h text height)
X201: Top Overlay "7" at 36.068,93.345 h1; Top Overlay "1" at 51.562,93.218 h1